# EAGLE board sensori di linea soccer 2018 (EAGLE 8.5.2)
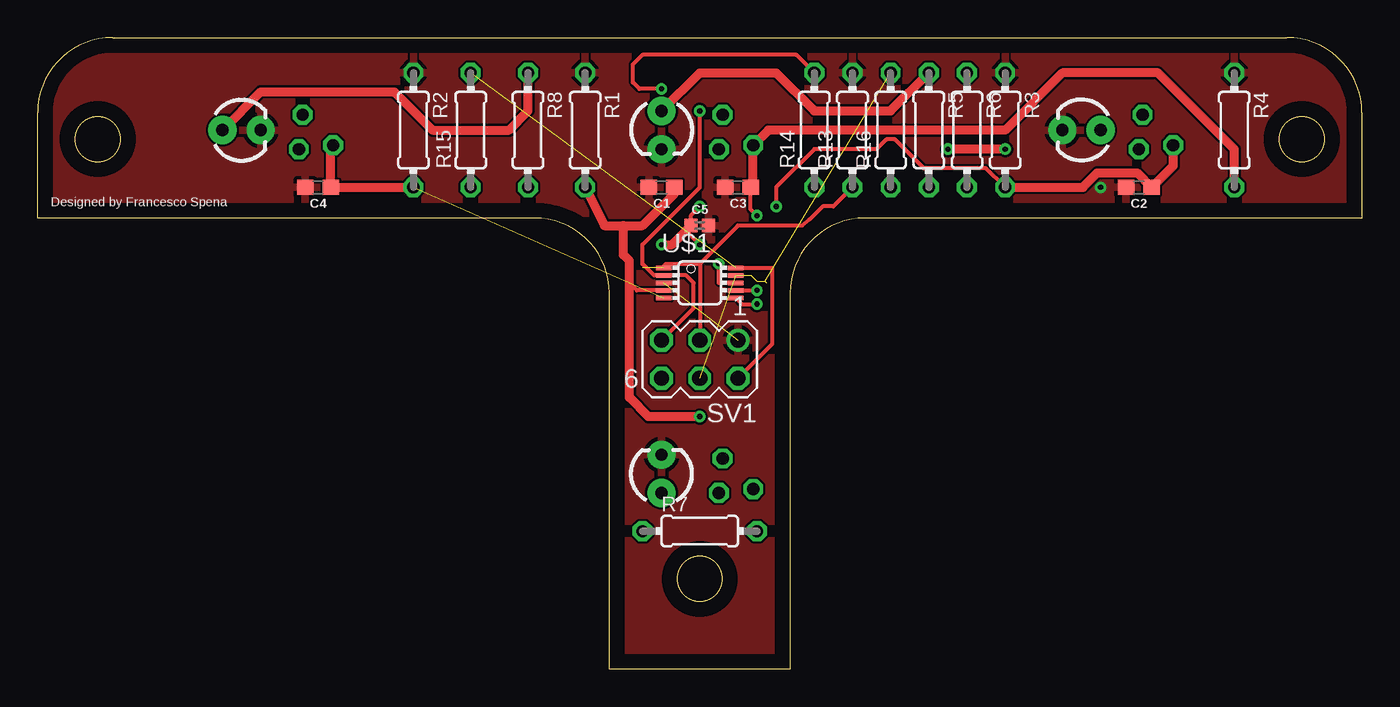
[diagram p0: board, top side]
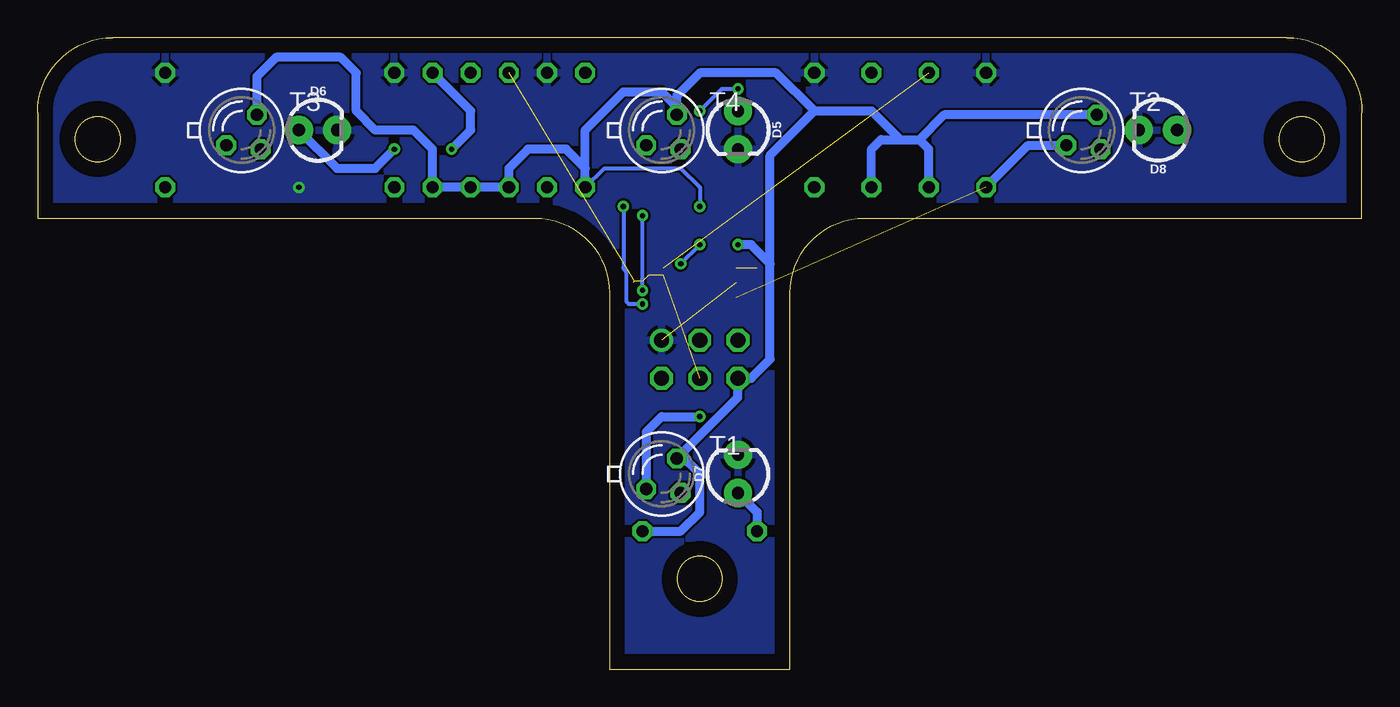
[diagram p1: board, bottom side, seen from below]

Size 88.1 x 42 mm. Coordinates in mm from the lower left corner, seen from the top.
Outline: 50.05,0 38.05,0 38.05,25 arc90 33.05,30 0,30 0,37 arc-90 5,42 83.1,42 arc-90 88.1,37 88.1,30 55.05,30 arc90 50.05,25 50.05,0
Outline: circle at 4,35.25 radius 1.5
Outline: circle at 84.1,35.25 radius 1.5
Outline: circle at 44.05,6 radius 1.5
Copper layers (1*16): Top 0.035mm / dielectric 1.5mm / Bottom 0.035mm
Design rules "default": minimum track width 6mil, minimum drill 0.35mm, track to track 6mil, track to pad 6mil, pad to pad 6mil, via to via 6mil, smd to smd 6mil, copper to edge 40mil, drill to drill 6mil, minimum pad ring 10mil, minimum via ring 8mil, stop-mask expansion 4mil, vias tented up to drill 0mil, thermal gap 10mil

## Footprints (pad centres in the part's own frame; a part is rotated, then mirrored left to right if it is on the bottom)
0603 = smd 1.1 x 1: 1 -0.85,0; 2 0.85,0
0402 = smd 0.85 x 0.9: 1 -0.58,0; 2 0.58,0
LED_3MM = drill 0.813 pad 1.88: A -1.27,0; K 1.27,0
0204/7 = drill 0.813 octagon: 1 -3.81,0; 2 3.81,0
MA03-2 = drill 1.016: 1 -2.54,-1.27 | drill 1.016 octagon: 2 -2.54,1.27; 3 0,-1.27; 4 0,1.27; 5 2.54,-1.27; 6 2.54,1.27
BP103 = drill 0.813 octagon: B 1.27,-1.27; C 1.016,1.016; E -1.016,-1.016
MSOP10_0.5 = smd 0.3 x 1.02: 1 -1,-2.4; 2 -0.5,-2.4; 3 0,-2.4; 4 0.5,-2.4; 5 1,-2.4; 6 1,2.4; 7 0.5,2.4; 8 0,2.4; 9 -0.5,2.4; 10 -1,2.4

## Placement (x,y rotation side)
C1  3.3nF  [0603]  41.51,32.04 180 top
C2  3.3nF  [0603]  73.26,32.04 180 top
C3  3.3nF  [0603]  46.59,32.04 180 top
C4  3.3nF  [0603]  18.65,32.04 180 top
C5  1.0uF  [0402]  44.05,29.5 0 top
D5  [LED_3MM]  41.51,35.85 270 bottom
D6  [LED_3MM]  69.45,35.85 0 bottom
D7  [LED_3MM]  41.51,12.99 90 bottom
D8  [LED_3MM]  13.57,35.85 180 bottom
R1  [0204/7]  36.43,35.85 270 top
R2  [0204/7]  25,35.85 270 top
R3  [0204/7]  64.37,35.85 270 top
R4  [0204/7]  79.61,35.85 270 top
R5  [0204/7]  59.29,35.85 270 top
R6  [0204/7]  61.83,35.85 270 top
R7  [0204/7]  44.05,9.18 0 top
R8  [0204/7]  32.62,35.85 270 top
R13  [0204/7]  54.21,35.85 90 top
R14  [0204/7]  51.67,35.85 90 top
R15  [0204/7]  28.81,35.85 90 top
R16  [0204/7]  56.75,35.85 90 top
SV1  [MA03-2]  44.05,20.61 180 top
T1  BP103  [BP103]  46.59,12.99 0 bottom
T2  BP103  [BP103]  18.65,35.85 0 bottom
T3  BP103  [BP103]  74.53,35.85 0 bottom
T4  BP103  [BP103]  46.59,35.85 0 bottom
U$1  ADS1015IDGT  [MSOP10_0.5]  44.05,25.69 270 top

## Library data of the parts
C1-C4 = SparkFun-Capacitors; PROD_ID: CAP-09633
C5 = SparkFun-Capacitors; PROD_ID: CAP-12417
D5-D8 = SparkFun-LED; PROD_ID: DIO-08794
R1-R4 R13-R16 = resistor
R5-R8 = rcl
SV1 = con-lstb; OC_FARNELL: unknown; OC_NEWARK: unknown
T1-T4 = opto-trans-siemens; OC_FARNELL: unknown; OC_NEWARK: unknown
U$1 = bt_adc

## Nets
ADDR: R13.1 SV1.3 U$1.1
ALERT: R14.2 SV1.5 U$1.2
GND: C1.2 C2.2 C3.2 C4.2 C5.2 D5.K D6.K D7.K D8.K R1.1 R2.1 R3.1 R4.1 R13.2 SV1.1 U$1.3
N$2: D5.A R5.1
N$3: D6.A R6.1
N$4: D7.A R7.1
N$5: D8.A R8.1
OUT1: C1.1 R1.2 T1.E U$1.4
OUT2: C4.1 R2.2 T2.E U$1.5
OUT3: C2.1 R3.2 T3.E U$1.6
OUT4: C3.1 R4.2 T4.E U$1.7
SCL: R15.2 SV1.2 U$1.10
SDA: R16.2 SV1.4 U$1.9
VCC: C5.1 R5.2 R6.2 R7.2 R8.2 R14.1 R15.1 R16.1 SV1.6 T1.C T2.C T3.C T4.C U$1.8

## Tracks (layer width: path | path; a pad name or v marks a point on that pad's centre or on a via)
ADDR  (1 unrouted)
  Top 0.254: U$1.1 arc-90 41.92,26.96 44.05,26.96 | 44.05,26.96 SV1.3 | R13.1 52.94,30.77 52.23,30.77 51.51,30.05 51.33,29.9 50.86,29.5 46.59,29.5 44.05,26.96
ALERT  (via drill 0.35)
  Top 0.254: R14.2 50.48,40.86 40.24,40.86 39.61,40.22 39.61,39.03 40.04,38.59 v41.51,38.59 | v44.05,37.12 44.05,32.04 40.24,28.23 40.24,26.96 41.01,26.19 41.51,26.19 U$1.2 43.15,26.19 43.65,25.69 43.65,24.01 SV1.5
  Bottom 0.254: v41.51,38.59 42.58,38.59 v44.05,37.12
GND  (via drill 0.35)  (1 unrouted)
  other vias: 70.72,32.04
  pour Top: 46.59,46.01 -1.67,46.01 -1.67,-2.25 91.04,-2.25 91.04,46.01
  pour Bottom: 27.54,46.01 -1.67,46.01 -1.67,-2.25 91.04,-2.25 91.04,46.01
N$2
  Top 0.61: D5.A 44.05,39.66 49.13,39.66 51.67,37.12 56.75,37.12 R5.1
N$3  (via drill 0.35)
  Top 0.61: v64.37,34.58 v60.56,34.58
  Bottom 0.61: D6.A 68.18,33.31 65.64,33.31 v64.37,34.58 | v60.56,34.58 59.29,35.85 59.29,37.12 R6.1
N$4
  Bottom 0.61: D7.A 40.24,10.45 R7.1
N$5
  Top 0.61: D8.A 14.84,38.39 23.73,38.39 26.27,35.85 31.35,35.85 32.62,37.12 R8.1
OUT1  (via drill 0.35)
  Top 0.254: U$1.4 39.87,25.19 39.37,25.69
  Top 0.61: R1.2 37.7,29.5 38.97,29.5 | 38.97,29.5 40.24,29.5 42.36,31.62 C1.1 | v44.05,16.8 40.64,16.8 39.37,18.07 39.37,25.69 39.37,27.15 38.97,27.55 38.97,29.5
  Bottom 0.61: T1.E 47.61,15.78 46.59,16.8 v44.05,16.8
OUT2  (1 unrouted)
  Top 0.61: T2.E 19.5,34.67 C4.1 R2.2
  Bottom 0.61: T2.E 22.21,34.83 R2.2
OUT3  (via drill 0.35)
  Top 0.254: R3.2 63.1,33.31 58.95,33.31 57.02,35.24 56.48,35.24 55.82,34.58 51.67,34.58 49.13,32.04 v49.13,30.77 | U$1.6 46.86,24.28 v47.86,24.28
  Top 0.61: T3.E 75.55,33.48 C2.1 73.15,33 70.5,33 69.54,32.04 R3.2
  Bottom 0.254: v49.13,30.77 49.13,26.7 | 49.13,26.7 48.91,26.47 | v47.86,24.28 48.77,24.28 48.91,24.42 48.91,26.41 49.09,26.6 49.13,26.7
OUT4  (via drill 0.35)
  Top 0.254: U$1.7 v47.86,25.19 47.94,25.19 | v47.86,30.16 47.44,30.58 C3.1
  Top 0.61: C3.1 47.61,32.21 T4.E 48.62,35.85 61.83,35.85 64.37,35.85 68.18,39.66 74.53,39.66 79.61,34.58 R4.2
  Bottom 0.254: v47.86,25.19 v47.86,30.16
SCL  (1 unrouted)
  Top 0.254: U$1.10 48.86,26.69 48.86,21.61 SV1.2
SDA  (6 unrouted)
VCC  (via drill 0.35)
  Top 0.254: U$1.8 45.32,25.69 v45.32,26.96 | v44.05,28.23 43.13,29.16 | C5.1 43.47,30.19 v44.05,30.77
  Top 0.61: v41.51,28.23 42.2,28.23 43.13,29.16 C5.1
  Bottom 0.254: v45.32,26.96 v44.05,28.23 | R14.1 50.4,33.31 45.32,33.31 44.05,32.04 v44.05,30.77
  Bottom 0.61: T3.C 73.52,39.41 72.24,40.68 67.93,40.68 66.91,39.66 66.91,37.12 65.64,35.85 63.1,35.85 61.83,34.58 R6.2 R5.2 R16.1 56.75,33.31 55.48,34.58 52.94,34.58 51.67,33.31 R14.1 51.67,35.85 49.13,38.39 46.59,38.39 45.58,37.37 T4.C 45.58,38.14 44.05,39.66 38.97,39.66 36.43,37.12 | 36.43,37.12 32.62,37.12 30.72,35.22 | T1.C 45.32,14.26 | 45.32,14.26 41.51,18.07 SV1.6 40.64,19.34 39.37,20.61 39.37,26.96 | 39.37,26.96 39.37,34.18 36.43,37.12 | T2.C 27.8,36.87 29.45,35.22 | 39.37,26.96 40.64,28.23 v41.51,28.23 | R7.2 45.32,9.18 44.05,10.45 44.05,12.99 45.32,14.26 | 29.45,35.22 28.81,34.58 R15.1 | 30.72,35.22 29.45,35.22 | 30.72,35.22 31.99,35.22 32.62,34.58 R8.2

## Text on the board
tPlace: Designed by Francesco Spena